# Altium PCB WiFi.PcbDoc
Units mm, origin at the board's own origin, x right, y up, seen from the top; angles counter-clockwise.
Board outline 30 x 26.8 mm, 4 copper layers (TopLayer, int1_power, int2_gnd, BottomLayer), stack 1.25 mm thick; 28 components, 27 nets, 200 pads, 86 vias.
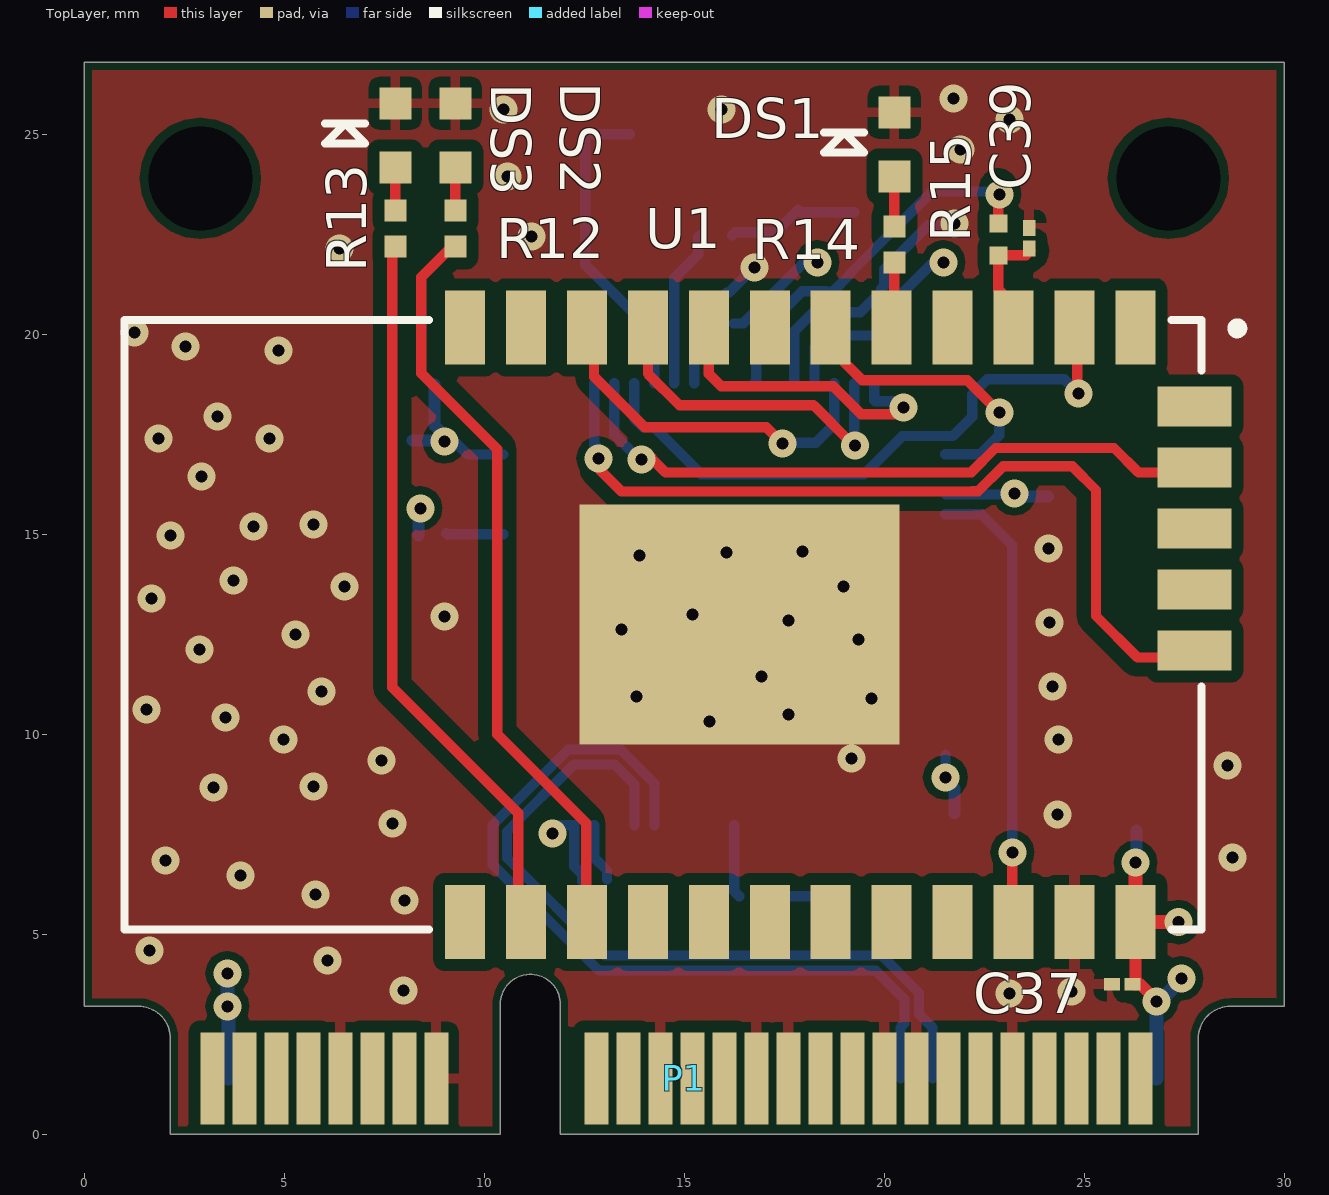
[diagram p0: TopLayer view]
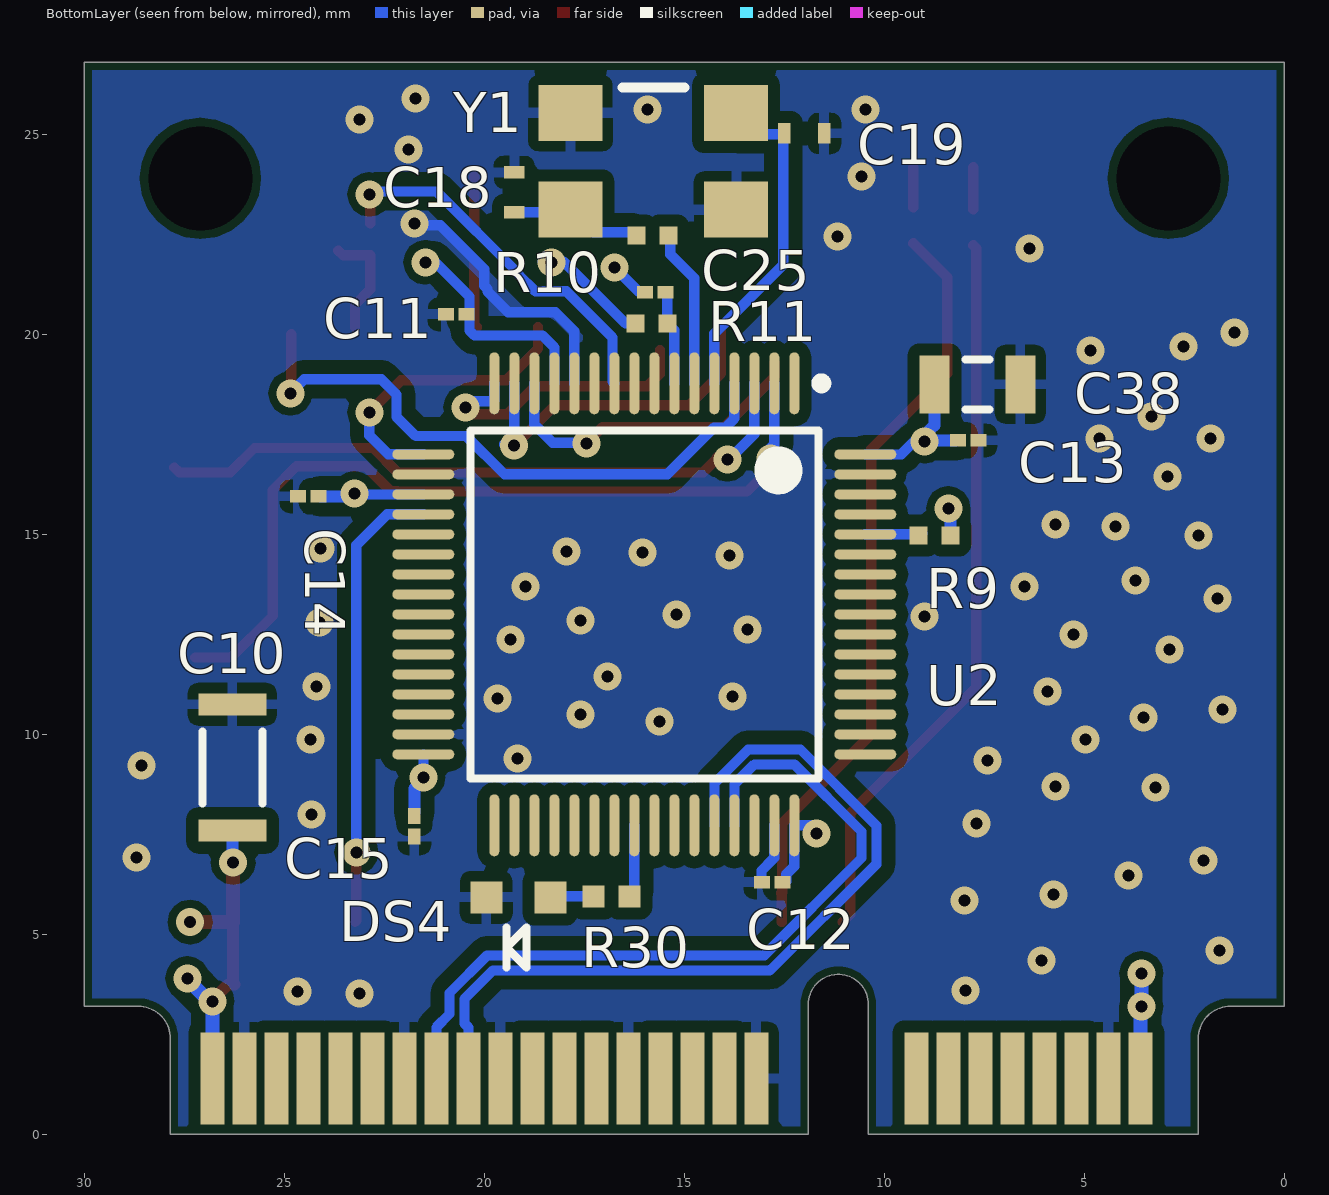
[diagram p1: BottomLayer view, seen from below]
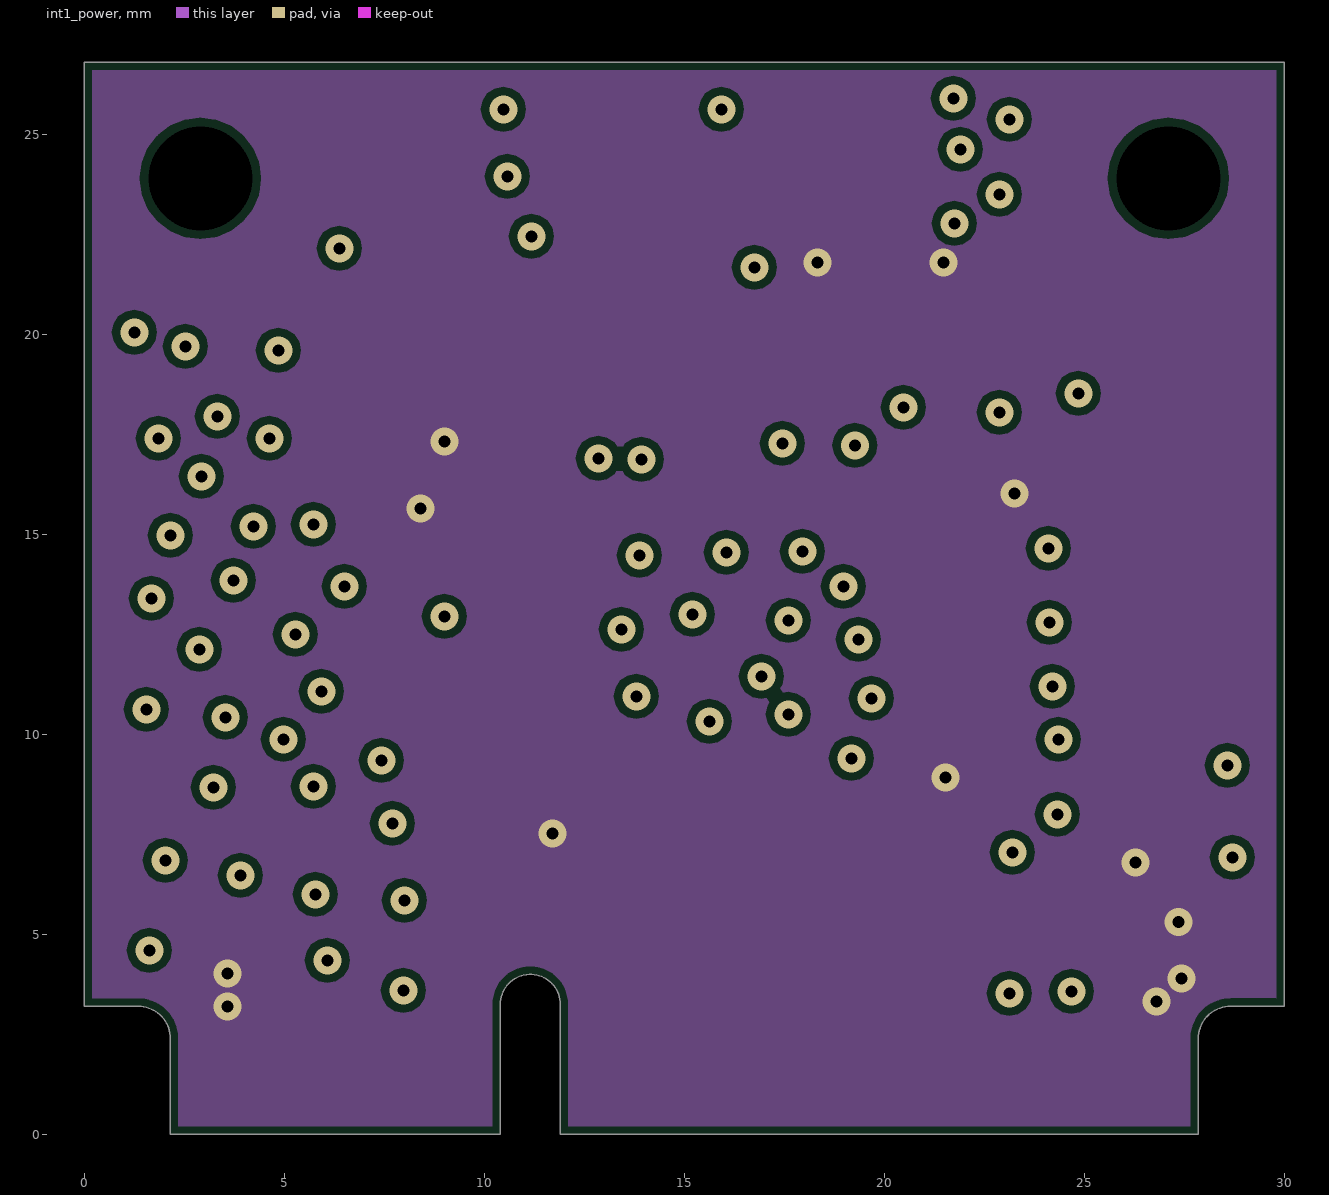
[diagram p2: int1_power]
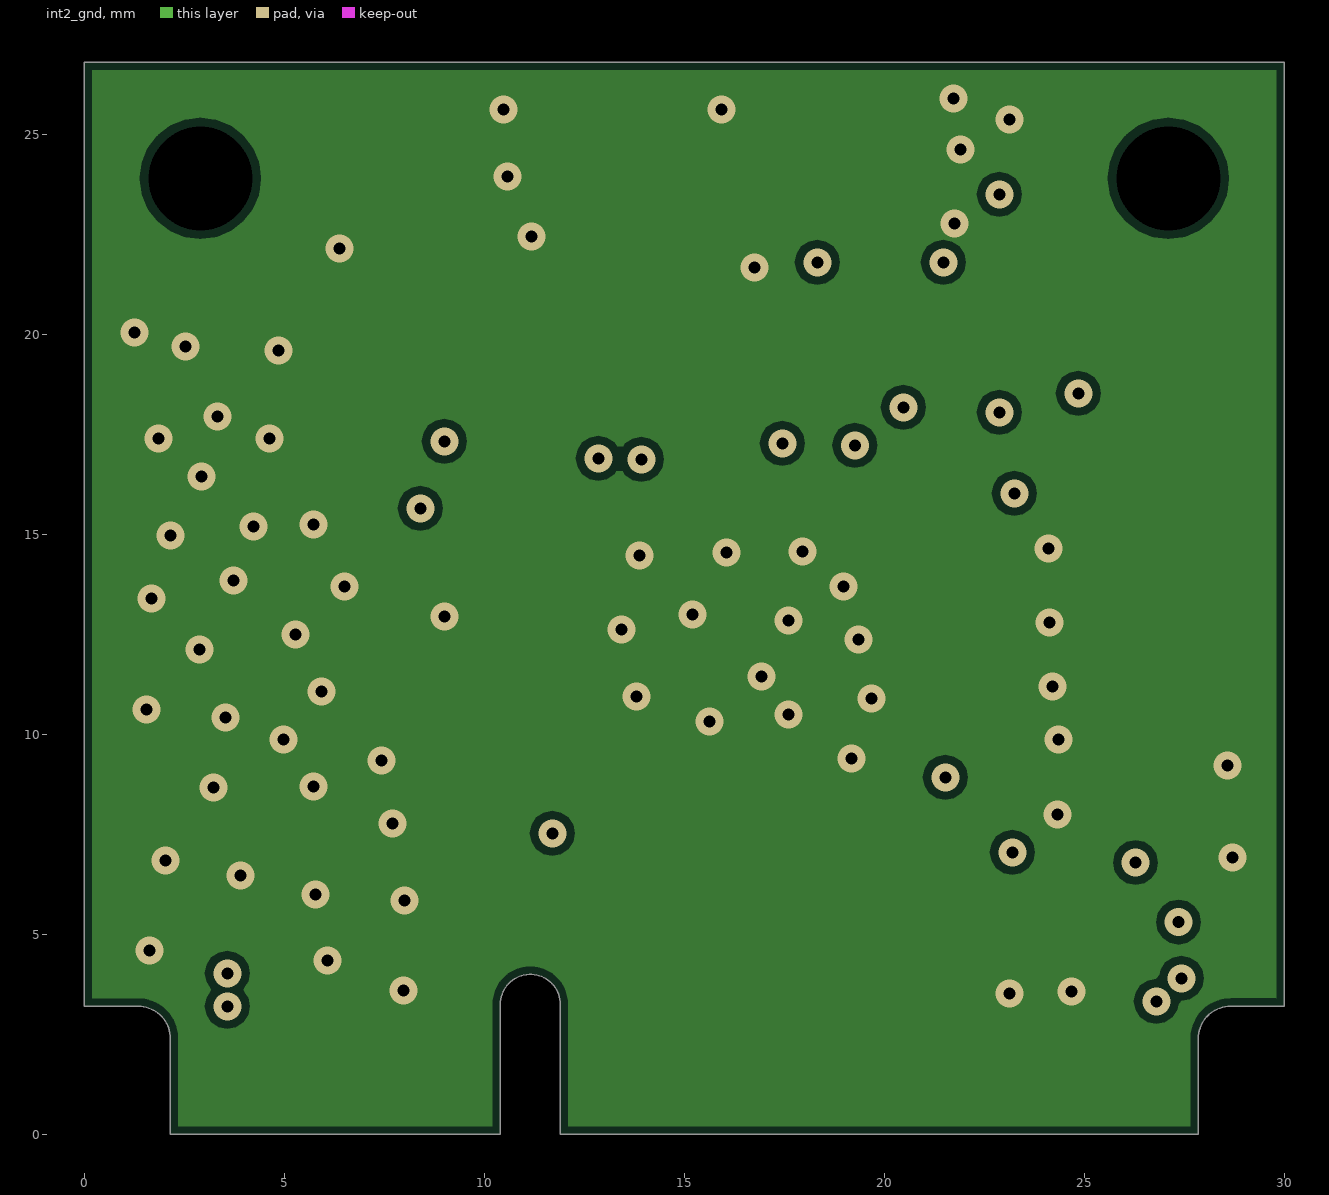
[diagram p3: int2_gnd]
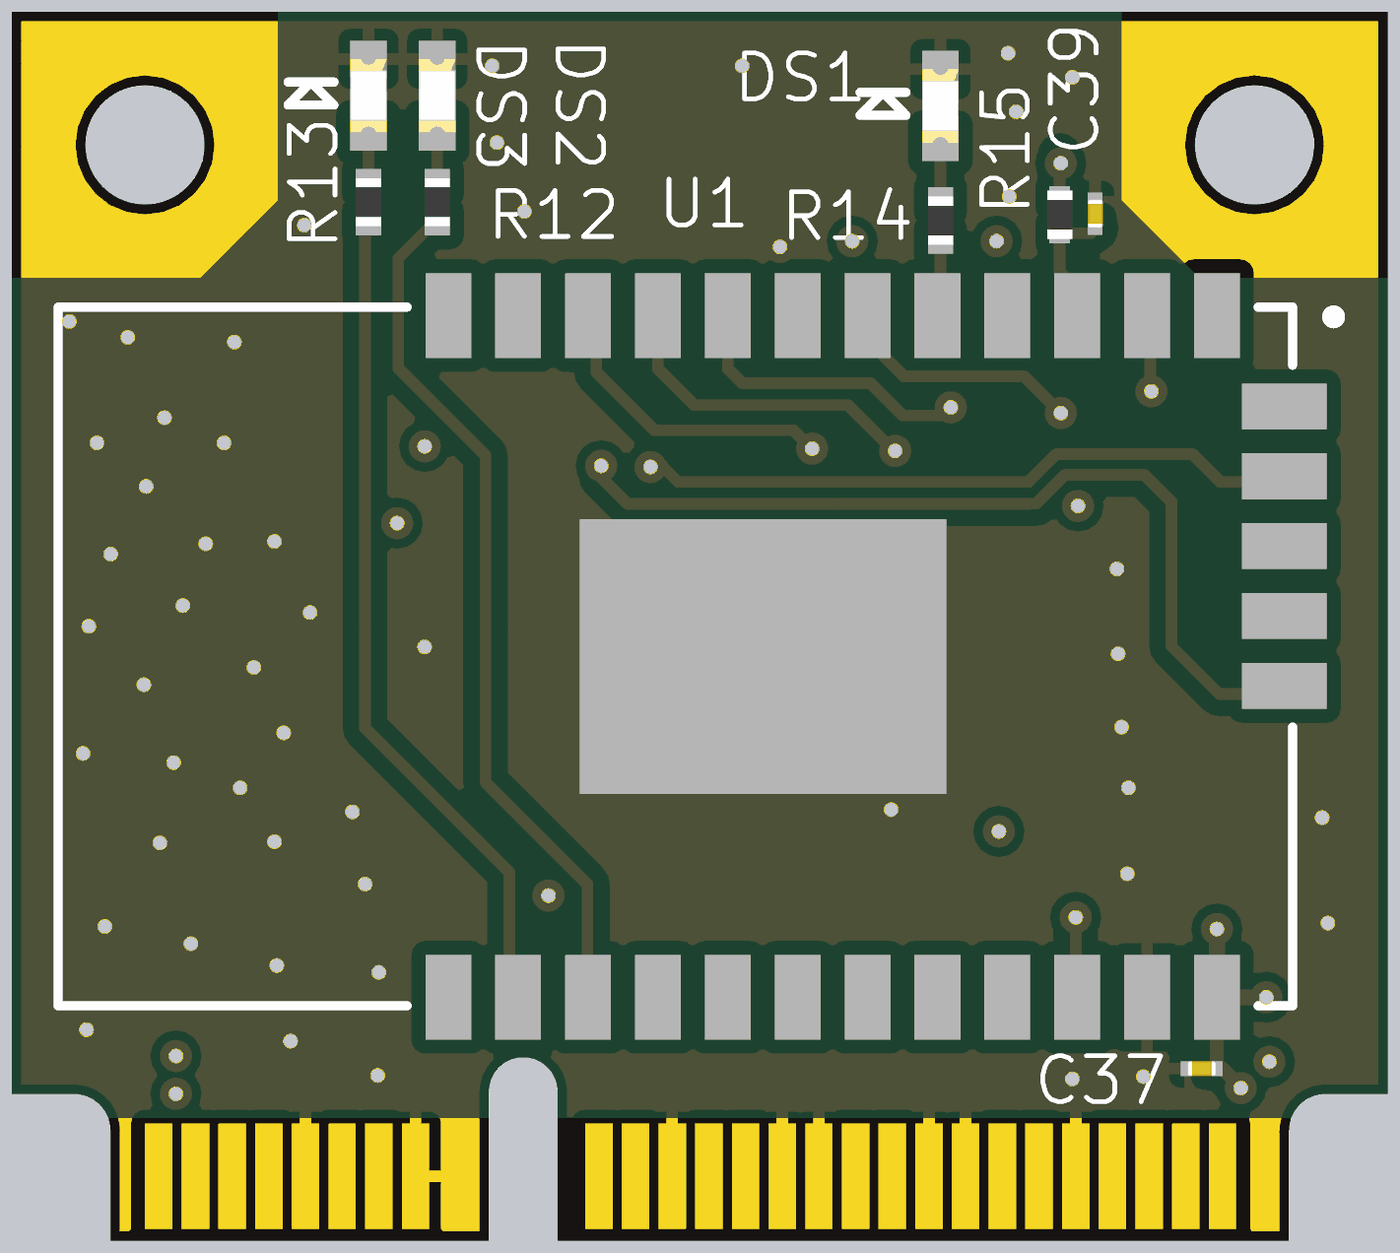
[diagram p4: 3D render of the assembled board from above, using the file's embedded part models]
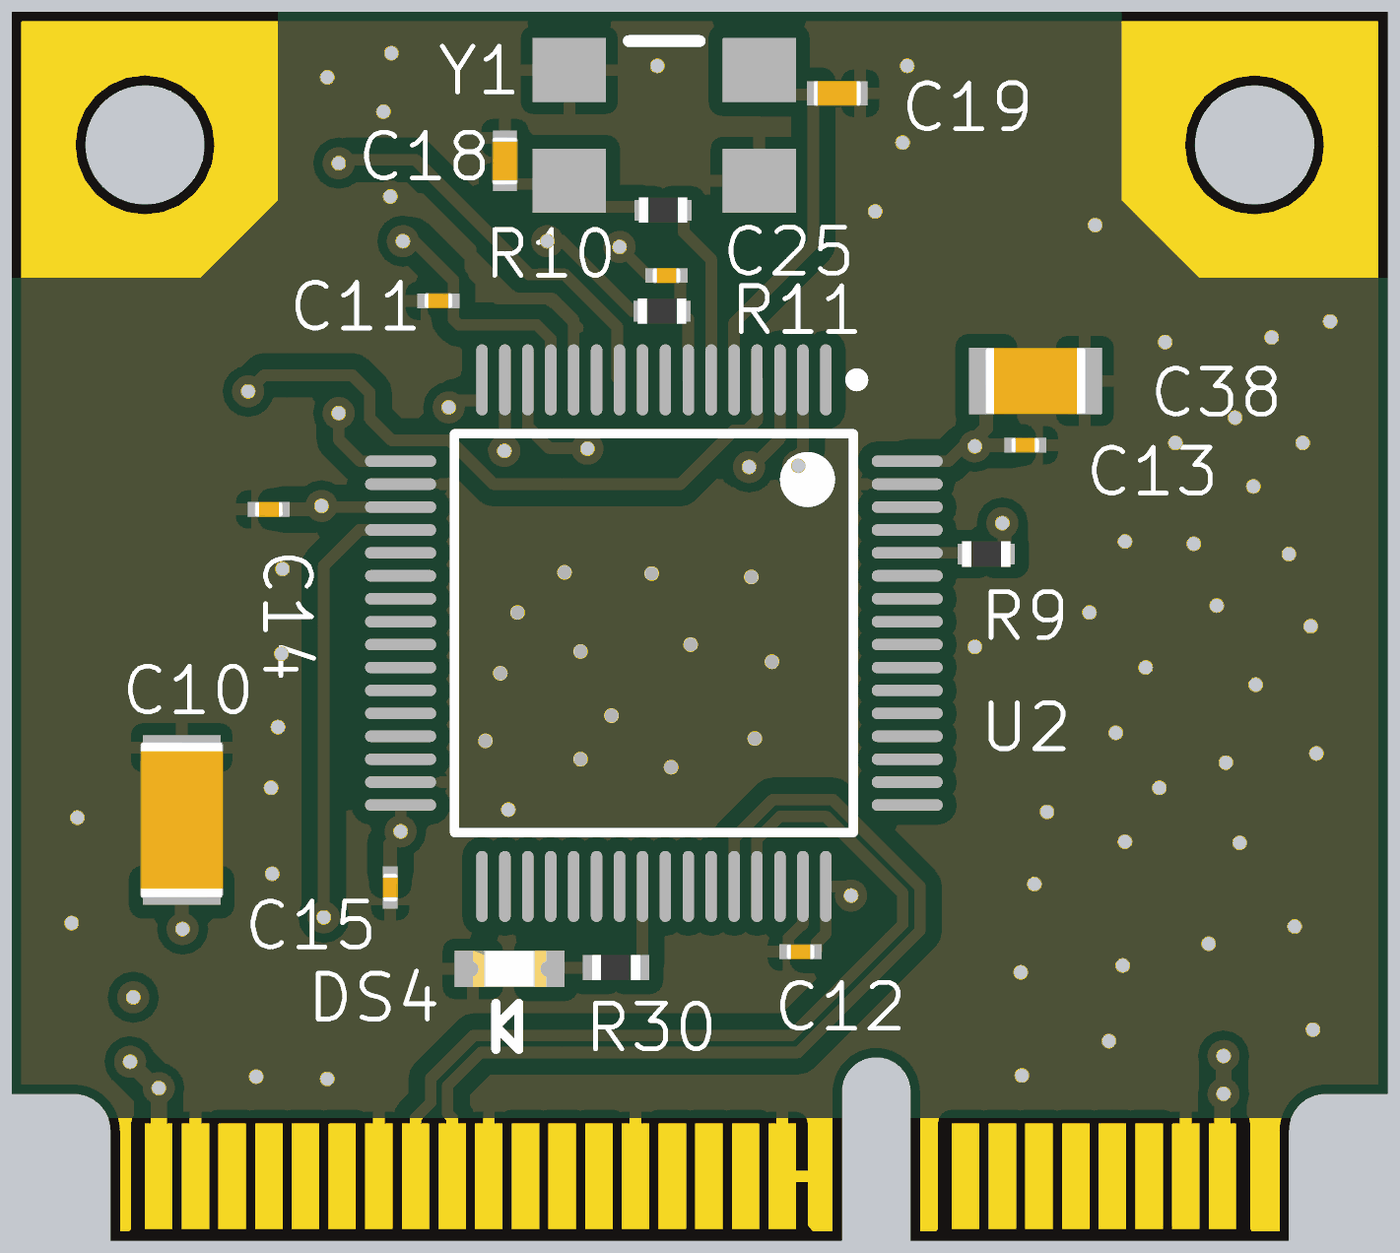
[diagram p5: 3D render of the assembled board from below, using the file's embedded part models]

## Layer stack, top to bottom
TopSolder: solder mask 0.025, Solder Resist, Dk 4.6
TopLayer: signal copper 0.05
Dielectric1: core 0.36, FR-4, Dk 4.6
int1_power: signal copper 0.035
Dielectric2: prepreg 0.36, FR-4, Dk 4.6
int2_gnd: signal copper 0.035
Dielectric3: core 0.36, FR-4, Dk 4.6
BottomLayer: signal copper 0.05
BottomSolder: solder mask 0.025, Solder Resist, Dk 4.6

## Board outline
2.15,2.4 ccw(c1.35,2.4) 1.35,3.2 0,3.2 0,26.8 30,26.8 30,3.2 28.65,3.2 ccw(c28.65,2.4) 27.85,2.4 27.85,0 11.9,0 11.9,3.25 ccw(c11.15,3.25) 10.4,3.25 10.4,0 2.15,0

## Design rules (kind name [scope] priority, off if disabled: settings)
BoardOutlineClearance [All] p1: gap=0.2 ignorepadtopadclearanceinfootprint=FALSE
Clearance Clearance_Diff_pair [InAnyDifferentialPair vs InAnyDifferentialPair] p1: gap=0.1 ignorepadtopadclearanceinfootprint=TRUE
Clearance [All] p2: gap=0.2 ignorepadtopadclearanceinfootprint=TRUE except(0: Arc-Hole Track-Hole SMDPad-Hole THPad-Hole Via-Hole Fill-Hole Poly-Hole Region-Hole Text-Hole; 0.3: SMDPad-Fill SMDPad-Poly SMDPad-Region; 0.35: Arc-Fill Arc-Poly Arc-Region Track-Fill Track-Poly Track-Region)
DiffPairsRouting [InDifferentialPair('PA12_USB_D')] p1: maxlimit=0.12 minlimit=0.12 mostfreqgap=0.12 toplayer_minwidth=0.25 toplayer_maxwidth=0.25 toplayer_prefwidth=0.25 midlayer1_minwidth=0.25 midlayer1_maxwidth=0.25 midlayer1_prefwidth=0.25 midlayer2_minwidth=0.25 midlayer2_maxwidth=0.25 midlayer2_prefwidth=0.25 bottomlayer_minwidth=0.25 bottomlayer_maxwidth=0.25 bottomlayer_prefwidth=0.25 maxuncoupledlength=1
FabricationTestPointUsage TestPointUsage [All] p1: valid=0 allowmultiple=FALSE
FabricationTestpoint Testpoint [All] p1: side=3 testpointundercomponent=TRUE minsize=1.016 maxsize=2.54 preferedsize=1.524 minholesize=0.508 maxholesize=1.016 preferedholesize=0.813 testpointgrid=0.025 allowsidetop=TRUE allowsidebottom=TRUE usegrid=TRUE gridtolerance=0
Height "PCI Express Mini, \"Component height constraints\", Page 18, bottom side" [OnBottomLayer] p1: minheight=0 maxheight=1.35 prefheight=1.35
Height "PCI Express Mini, \"Component height constraints\", Page 18, top side" [OnTopLayer] p2: minheight=0 maxheight=2.4 prefheight=2.4
PlaneClearance [All] p1: clearance=0
PolygonConnect PolygonConnect_Pad [InPadClass('Polygon')] p1: connectstyle=Direct reliefconductorwidth=0.254 reliefentries=4 polygonreliefangle="90 Angle" airgapwidth=0.254
PolygonConnect PolygonConnect_All [All] p2: thpad.connectstyle=Relief thpad.reliefconductorwidth=0.254 thpad.reliefentries=4 thpad.polygonreliefangle="90 Angle" thpad.airgapwidth=0.254 smdpad.connectstyle=Relief smdpad.reliefconductorwidth=0.254 smdpad.reliefentries=4 smdpad.polygonreliefangle="90 Angle" smdpad.airgapwidth=0.254 via.connectstyle=Direct via.reliefconductorwidth=0.254 via.reliefentries=4 via.polygonreliefangle="90 Angle" via.airgapwidth=0.254
RoutingVias [All] p1: holewidth=0.3 width=0.7 viastyle="Through Hole" minholewidth=0.3 minwidth=0.7 maxholewidth=0.3 maxwidth=0.7
SilkToSolderMaskClearance SilkscreenOverComponentPads [IsPad] p1: minsilkscreentomaskgap=0.254 clearancetoexposedcopper=TRUE
SolderMaskExpansion [HasPad('J2-M2')] p1: expansion=0
Width [All] p1: maxlimit=0.35 minlimit=0.25 preferedwidth=0.3
24 further rules are at their usual default settings.

## Classes and differential pairs
pad class Polygon: U1-25
differential pair PA12_USB_D: +PA12_USB_D_P -PA12_USB_D_N

## Components (designator, comment, footprint, x,y, rotation, side; value= is the part's Value field where it differs from the comment)
C10 "C3216X5R1A476M160AB" CAPC3216X180X20LL20 26.3,9.175 r270 bottom
C11 "GRM033R60J104KE19D" CAPC0603X33X15LL03T05 20.7,20.5 r180 bottom
C12 "GRM033R60J104KE19D" CAPC0603X33X15LL03T05 12.8,6.3 r180 bottom
C13 "GRM033R60J104KE19D" CAPC0603X33X15LL03T05 7.9,17.35 r0 bottom
C14 "GRM033R60J104KE19D" CAPC0603X33X15LL03T05 24.4,15.95 r180 bottom
C15 "GRM033R60J104KE19D" CAPC0603X33X15LL03T05 21.75,7.7 r90 bottom
C18 "C1005C0G1H220J050BA" CAPC1005X55X10LL05 19.25,23.55 r270 bottom
C19 "C1005C0G1H220J050BA" CAPC1005X55X10LL05 12,25.025 r180 bottom
C25 "GRM033R60J104KE19D" CAPC0603X33X15LL03T05 15.725,21.05 r180 bottom
C37 "GRM033R60J104KE19D" CAPC0603X33X15LL03T05 25.95,3.75 r0 top
C38 "C2012X5R1C106K085AC" CAPC2013X100X20NL20 7.675,18.75 r0 bottom
C39 "GRM033R60J104KE19D" CAPC0603X33X15LL03T05 23.625,22.4 r90 top
DS1 "150060VS75000" WE-150060VS75000_V 20.25,24.75 r270 top
DS2 "150060VS75000" WE-150060VS75000_V 9.275,24.975 r270 top
DS3 "150060VS75000" WE-150060VS75000_V 7.775,24.975 r270 top
DS4 "150060VS75000" WE-150060VS75000_V 19.15,5.925 r180 bottom
P1 "PCIeMini-CN-2S-M-R52" PCIeMini-GF-2D-800-1K-S52 15,1.4 r0 top locked
R9 "ERJ-2RKF1002X" RESC1005X40X25LL05T05 8.75,14.975 r0 bottom
R10 "ERJ-2GEJ241x" RESC1005X40X25LL05T05 15.8,22.475 r0 bottom
R11 "ERJ-2RKF1002X" RESC1005X40X25LL05T05 15.825,20.275 r180 bottom
R12 "ERJ-2RKF1001X" RESC1005X40X25NL05T05 9.275,22.65 r270 top
R13 "ERJ-2RKF1001X" RESC1005X40X25NL05T05 7.775,22.65 r270 top
R14 "ERJ-2RKF1001X" RESC1005X40X25NL05T05 20.25,22.25 r270 top
R15 "ERJ-2RKF4701X" RESC1005X40X25LL05T05 22.85,22.375 r90 top
R30 "ERJ-2RKF1001X" RESC1005X40X25NL05T05 16.825,5.95 r180 bottom
U1 "SPWF01SA" STM-SPWF01SA_V 16.38,12.741 r180 top
U2 "STM32F103RBT7TR" STM-LQFP64_L 16,13.25 r270 bottom
Y1 "FQ5032B-24" FOX-FQ5032B_V 15.775,24.325 r180 bottom

## Footprints (in the part's own frame and the unit in brackets; to place one, negate y for a bottom-side part, rotate by r counter-clockwise, add the part's x,y. Pads: shape width x height; smd on the part's side, far side on the other; paste and mask are expansions set on the pad)
CAPC0603X33X15LL03T05 [mm] "Chip Capacitor, 2-Leads, Body 0.63x0.33mm, IPC High Density"
  rect 0.4x0.32 smd: 1(-0.26,0) 2(0.26,0)
  body extent -0.31,-0.16 0.32,0.17, height 0.33
CAPC1005X55X10LL05 [mm] "Chip Capacitor, 2-Leads, Body 1.05x0.55mm, IPC High Density"
  rect 0.32x0.52 smd: 1(-0.5,0) 2(0.5,0)
  body extent -0.52,-0.28 0.53,0.27, height 0.55
CAPC2013X100X20NL20 [mm] "Chip Capacitor, 2-Leads, Body 2.2x1.45mm, IPC Medium Density"
  rect 0.75x1.45 smd: 1(-1.075,0) 2(1.075,0)
  silkscreen extent -0.3,-0.63 0.3,0.63, body extent -1.1,-0.72 1.1,0.72, height 1
CAPC3216X180X20LL20 [mm] "Chip Capacitor, 2-Leads, Body 3.40x1.80mm, IPC High Density"
  rect 0.55x1.7 smd: 1(-1.575,0) 2(1.575,0)
  silkscreen extent -0.9,-0.75 0.9,0.75, body extent -1.7,-0.9 1.7,0.9, height 1.8
FOX-FQ5032B_V [mil] "SMT Crystal, 4-Leads, Body 5.2x3.4mm"
  rect 63x55 smd: 1(-81.5,-47.5) 2(81.5,-47.5) 3(81.5,47.5) 4(-81.5,47.5)
  silkscreen extent -30,72 31,72, body extent -114,-52 113,51, height 47
PCIeMini-GF-2D-800-1K-S52 [mm] "Golden finger, PCIeMini, Dual, Staggered, Pitch 0.8mm, 52-Position"
  rect 0.6x2.3 smd paste-0.9: 1(-11.8,0) 3(-11,0) 5(-10.2,0) 7(-9.4,0) 9(-8.6,0) 11(-7.8,0) 13(-7,0) 15(-6.2,0) 17(-2.2,0) 19(-1.4,0) 21(-0.6,0) 23(0.2,0) 25(1,0) 27(1.8,0) 29(2.6,0) 31(3.4,0) 33(4.2,0) 35(5,0) 37(5.8,0) 39(6.6,0) 41(7.4,0) 43(8.2,0) 45(9,0) 47(9.8,0) 49(10.6,0) 51(11.4,0)
  rect 0.6x2.3 smd far side paste-0.9: 2(-11.4,0) 4(-10.6,0) 6(-9.8,0) 8(-9,0) 10(-8.2,0) 12(-7.4,0) 14(-6.6,0) 16(-5.8,0) 18(-1.8,0) 20(-1,0) 22(-0.2,0) 24(0.6,0) 26(1.4,0) 28(2.2,0) 30(3,0) 32(3.8,0) 34(4.6,0) 36(5.4,0) 38(6.2,0) 40(7,0) 42(7.8,0) 44(8.6,0) 46(9.4,0) 48(10.2,0) 50(11,0) 52(11.8,0)
RESC1005X40X25LL05T05 [mm] "Chip Resistor, 2-Leads, Body 1.05x0.55mm, IPC High Density"
  rect 0.45x0.45 smd: 1(-0.4,0) 2(0.4,0)
  body extent -0.52,-0.28 0.53,0.27, height 0.4
RESC1005X40X25NL05T05 [mm] "Chip Resistor, 2-Leads, Body 1.05x0.55mm, IPC Medium Density"
  rect 0.55x0.55 smd: 1(-0.45,0) 2(0.45,0)
  body extent -0.53,-0.28 0.53,0.28, height 0.4
STM-LQFP64_L [mm] "Thin QFP, 64-Leads, Body 10x10mm, Pitch 0.5mm, IPC High Density"
  oval 1.55x0.25 smd: 1(-5.525,3.75) 2(-5.525,3.25) 3(-5.525,2.75) 4(-5.525,2.25) 5(-5.525,1.75) 6(-5.525,1.25) 7(-5.525,0.75) 8(-5.525,0.25) 9(-5.525,-0.25) 10(-5.525,-0.75) 11(-5.525,-1.25) 12(-5.525,-1.75) 13(-5.525,-2.25) 14(-5.525,-2.75) 15(-5.525,-3.25) 16(-5.525,-3.75) 33(5.525,-3.75) 34(5.525,-3.25) 35(5.525,-2.75) 36(5.525,-2.25) 37(5.525,-1.75) 38(5.525,-1.25) 39(5.525,-0.75) 40(5.525,-0.25) 41(5.525,0.25) 42(5.525,0.75) 43(5.525,1.25) 44(5.525,1.75) 45(5.525,2.25) 46(5.525,2.75) 47(5.525,3.25) 48(5.525,3.75)
  oval 0.25x1.55 smd: 17(-3.75,-5.525) 18(-3.25,-5.525) 19(-2.75,-5.525) 20(-2.25,-5.525) 21(-1.75,-5.525) 22(-1.25,-5.525) 23(-0.75,-5.525) 24(-0.25,-5.525) 25(0.25,-5.525) 26(0.75,-5.525) 27(1.25,-5.525) 28(1.75,-5.525) 29(2.25,-5.525) 30(2.75,-5.525) 31(3.25,-5.525) 32(3.75,-5.525) 49(3.75,5.525) 50(3.25,5.525) 51(2.75,5.525) 52(2.25,5.525) 53(1.75,5.525) 54(1.25,5.525) 55(0.75,5.525) 56(0.25,5.525) 57(-0.25,5.525) 58(-0.75,5.525) 59(-1.25,5.525) 60(-1.75,5.525) 61(-2.25,5.525) 62(-2.75,5.525) 63(-3.25,5.525) 64(-3.75,5.525)
  silkscreen extent -5.65,-4.35 4.35,4.55, body extent -5,-5 5,5, height 1.6
STM-SPWF01SA_V [mm] "SMD, 30-Leads, Body 26.924x15.24mm, Pitch 1.524mm, Height 2.45mm"
  rect 1x1.85 smd: 1(-9.9,-7.435) 2(-8.376,-7.435) 3(-6.852,-7.435) 4(-5.328,-7.435) 5(-3.804,-7.435) 6(-2.28,-7.435) 7(-0.756,-7.435) 8(0.768,-7.435) 9(2.292,-7.435) 10(3.816,-7.435) 11(5.34,-7.435) 12(6.864,-7.435) 13(6.864,7.435) 14(5.34,7.435) 15(3.816,7.435) 16(2.292,7.435) 17(0.768,7.435) 18(-0.756,7.435) 19(-2.28,7.435) 20(-3.804,7.435) 21(-5.328,7.435) 22(-6.852,7.435) 23(-8.376,7.435) 24(-9.9,7.435)
  rect 8x6 smd: 25(0,0)
  rect 1.85x1 smd: 26(-11.37,0.641) 27(-11.37,-0.883) 28(-11.37,-2.407) 29(-11.37,-3.931) 30(-11.37,-5.455)
  silkscreen extent -12.57,-7.62 15.37,7.62, body extent -11.55,-7.62 15.37,7.62, height 2.45
WE-150060VS75000_V [mm] "SMD, 2-Leads, Body 1.6x0.8mm"
  rect 0.8x0.8 smd: 1(-0.8,0) 2(0.8,0)
  silkscreen extent -0.3,-1.75 0.2,-0.75, body extent -0.8,-0.4 0.8,0.4, height 0.7

## Part data
C10: library part CMP-1663-00005-1, "Chip Capacitor, 47 uF, +/- 20%, 10 V, -55 to 85 degC, 1206 (3216 Metric), RoHS, Tape and Reel"
C11 C12 C13 C14 C15 C25 C37 C39: library part CMP-2010-01652-4, "Chip Capacitor, 100 nF, +/- 10%, 6.3 V, -55 to 85 degC, 0201 (0603 Metric), RoHS, Tape and Reel"
C18 C19: library part CMP-1663-00008-2, "Chip Capacitor, 22 pF, +/- 5%, 50 V, -55 to 125 degC, 0402 (1005 Metric), RoHS, Tape and Reel"
C38: library part CMP-1663-00007-1, "Chip Capacitor, 10 uF, +/- 10%, 16 V, -55 to 85 degC, 0805 (2012 Metric), RoHS, Tape and Reel"
DS1 DS2 DS3 DS4: library part CMP-1712-00001-3, "WL-SMCW SMD Chip LED Top View Monocolor Waterclear, 30 mA, 2 V, -40 to 85 degC, 2-Pin SMD, RoHS, Tape and Reel"
P1: library part CMP-0001-00067-2, "Golden finger, PCIeMini, Dual, Staggered, Pitch 0.8mm, 52-Position"
R9 R11: library part CMP-2002-00607-3, "Chip Resistor, 10 KOhm, +/- 1%, 100 mW, -55 to 155 degC, 0402 (1005 Metric), RoHS, Tape and Reel"
R10: library part CMP-2002-00493-3, "Chip Resistor, 240 Ohm, +/- 5%, 100 mW, -55 to 155 degC, 0402 (1005 Metric), RoHS, Tape and Reel"
R12 R13 R14 R30: library part CMP-2002-00606-3, "Chip Resistor, 1 KOhm, +/- 1%, 100 mW, -55 to 155 degC, 0402 (1005 Metric), RoHS, Tape and Reel"
R15: library part CMP-1665-00031-3, "Chip Resistor, 4.7 KOhm, +/- 1%, 0.1 W, -55 to 155 degC, 0402 (1005 Metric), RoHS, Tape and Reel"
U1: library part CMP-1771-00005-1, "Serial to WiFi Server IEEE802.11b/g/n Intelligent Module, 3.3 V, - 40 to 85 degC, 30-Pin SMD, RoHS, Tray"
U2: library part CMP-0237-00158-3, "ARM Cortex-M3 32-bit MCU, 128 KB Flash, 20 KB Internal RAM, 51 I/Os, 64-pin LQFP, -40 to 105 degC, Tape and Reel"
Y1: library part CMP-0399-00003-1, "Crystal Oscillator, SMD, 24MHz, Stab=30ppm 20.0pF"

## Free pads (board coordinates)
  round 2.3 hole 2.6 unplated: MH1(2.9,23.9) MH2(27.1,23.9)

## Via types
v1: diameter 0.7, hole 0.3, TopLayer to BottomLayer, tented both sides, 86 vias

## Nets (pads, with @x,y where several pads share a name; then routed paths per layer and width w, separated by ;. In a path a pad name is that pad's centre, name@x,y a point inside that pad or via, vN(x,y) a via of type N, cw(c..) or ccw(c..) an arc to the next point about the centre after c; other vN are vias at no path point)
3V3: C10.2 C11.2 C12.2 C13.2 C14.2 C15.2 C37.2 C38.2 P1.2 P1.52 R9.1 R11.1 U1.24 U2.13 U2.19 U2.32 U2.48 U2.64 | length 30.7
  TopLayer w0.25: v1@26.28,6.78 v1(26.28,6.795)
  TopLayer w0.3: C37.2@26.25,3.75 26.4,3.75 v1@26.7,3.45 ; U1.24 26.28,3.87 C37.2@26.3,3.85
  TopLayer w0.35: v1@26.28,6.78 U1.24 v1(27.356,5.306)
  BottomLayer w0.25: v1(9,17.325) 9.25,17.325 9.575,17 U2.64 ; R11.1 16.475,20.275 18.025,21.825 18.55,21.825 18.325,21.6 v1(18.325,21.8) ; U2.13 18.25,19.675 18.55,19.975 20.25,19.975 20.375,20.1 20.375,20.95 21.275,21.85 21.475,21.85 v1(21.475,21.8) ; v1(21.525,8.925) U2.32 ; U2.19 v1@23.075,16
  BottomLayer w0.254: v1(11.7,7.525) 11.55,7.525 11.75,7.725 U2.48 12.25,6.7 12.45,6.5 C12.2@12.45,6.325
  BottomLayer w0.3: C13.2@8.21,17.35 8.975,17.35 v1(9,17.325) ; R9.1 8.35,15.6 v1(8.4,15.65) ; C38.2 8.75,17.725 v1@9.025,17.45 ; v1@21.475,8.925 21.75,8.65 C15.2@21.75,8.035 ; v1@23.3,16.025 23.375,15.95 C14.2@24.09,15.95 ; v1@26.275,6.925 26.3,6.95 C10.2
  BottomLayer w0.35: v1(3.575,4.025) v1(3.575,3.2) 3.6,3.175 P1.2 ; P1.52 v1(26.8,3.325) 26.875,3.325 27.425,3.875 v1(27.425,3.9)
  other v1: 23.25,16.025
GND: C10.1 C11.1 C12.1 C13.1 C14.1 C15.1 C18.1 C19.2 C25.1 C37.1 C38.1 C39.2 DS1.1 DS2.1 DS3.1 DS4.1 P1.4 P1.9 P1.15 P1.18 P1.21 P1.26 P1.27 P1.29 P1.34 P1.35 P1.37 P1.40 P1.43 P1.50 U1.23 U1.25 U2.12 U2.18 U2.31 U2.47 U2.63 Y1.2 Y1.4 | length 9
  BottomLayer w0.25: C25.1@16.06,21.05 16.125,21.05 v1(16.75,21.675)
  BottomLayer w0.254: U2.47 12.75,6.908 12.783,6.875 12.787,6.875 13.067,6.595 C12.1@13.067,6.375 ; U2.12 17.75,20.075 18.225,20.55 19.4,20.55 19.923,21.073 19.923,21.137 20,21.214 20,21.625 21.1,22.725 v1@21.625,22.725
  other v1: 23.125,3.525 24.675,3.575 7.975,3.6 6.075,4.35 1.625,4.6 8,5.85 5.775,6 3.9,6.475 2.025,6.85 28.7,6.925 7.7,7.775 24.325,8 3.225,8.675 5.725,8.7 28.575,9.225 7.425,9.35 19.175,9.4 4.975,9.875 24.35,9.875 15.625,10.325 3.525,10.425 17.6,10.5 1.55,10.625 19.675,10.9 13.8,10.95 5.925,11.075 24.2,11.2 16.925,11.45 2.875,12.125 19.35,12.375 5.275,12.5 13.425,12.625 24.125,12.8 17.6,12.85 9,12.95 15.2,13 1.675,13.4 6.5,13.7 18.975,13.7 3.725,13.85 13.875,14.475 16.05,14.55 17.95,14.575 24.1,14.65 2.15,14.975 4.225,15.2 5.725,15.25 2.925,16.45 1.85,17.4 4.625,17.4 3.325,17.95 4.85,19.6 2.525,19.7 1.25,20.05 6.375,22.15 11.175,22.45 21.75,22.775 10.575,23.95 21.9,24.625 23.125,25.375 10.475,25.625 15.925,25.625 21.725,25.9
NetC18_2: C18.2 R10.2 Y1.1 | length 3.3
  BottomLayer w0.254: R10.2 16.275,22.55 17.277,22.55 Y1.1 17.914,23.05 C18.2
NetC19_1: C19.1 U2.5 Y1.3 | length 8.1
  BottomLayer w0.254: C19.1 C19.1@12.525,25 ; Y1.3@13.636,25 C19.1@12.525,25 ; U2.5 14.25,20.012 12.525,21.737 C19.1@12.525,25
NetC25_2: C25.2 R11.2 U2.7 | length 2.2
  BottomLayer w0.254: U2.7 15.25,20.1 R11.2 C25.2@15.425,20.942
NetC39_1: C39.1 R15.1 U1.3 | length 2.8
  TopLayer w0.254: U1.3 23.232,20.743 22.85,21.125 R15.1 23.535,21.975 C39.1@23.65,22.09
NetDS1_2: DS1.2 R14.1 | length 1.3
  TopLayer w0.254: R14.1 DS1.2
NetDS2_2: DS2.2 R12.1 | length 1
  TopLayer w0.254: R12.1@9.275,23.175 DS2.2
NetDS3_2: DS3.2 R13.1 | length 1
  TopLayer w0.254: R13.1@7.775,23.125 DS3.2
NetDS4_2: DS4.2 R30.1 | length 1.2
  BottomLayer w0.254: R30.1 18.4,5.95 DS4.2@18.45,6
NetR9_2: R9.2 U2.60 | length 1.4
  BottomLayer w0.254: R9.2@9.05,15.025 9.075,15 U2.60
NetR10_1: R10.1 U2.6 | length 4
  BottomLayer w0.254: U2.6 14.75,21.4 15.35,22 15.35,22.425 R10.1
NetR12_2: R12.2 U1.15 | length 19.1
  TopLayer w0.254: R12.2@9.275,22.275 8.425,21.425 8.425,19.025 10.325,17.125 10.325,10 12.55,7.775 12.55,6.05 U1.15@12.564,6.036 ; U1.15 U1.15@12.564,6.036 ; U1.15@12.575,6.025 U1.15@12.564,6.036
NetR13_2: R13.2 U1.14 | length 18.3
  TopLayer w0.254: R13.2@7.775,22.225 7.7,22.15 7.7,11.175 10.55,8.325 10.85,8.025 10.85,5.496 U1.14
NetR14_2: R14.2 U1.5 | length 1.7
  TopLayer w0.254: U1.5 20.25,20.242 R14.2
NetR30_2: R30.2 U2.40 | length 1.8
  BottomLayer w0.254: U2.40 16.25,6.075 R30.2
PA0_USART2_CTS: U1.10 U2.14 | length 8.3
  TopLayer w0.254: U1.10@12.745,19.303 12.745,18.94 14.008,17.677 17.048,17.677 v1(17.45,17.275)
  BottomLayer w0.254: v1(17.45,17.275) 17.463,17.288 18.288,17.288 18.75,17.75 U2.14
PA1_USART2_RTS: U1.9 U2.15 | length 8.7
  TopLayer w0.254: U1.9 14.088,19.018 14.881,18.225 18.232,18.225 v1@19.161,17.296
  BottomLayer w0.254: U2.15 19.25,17.238 v1(19.263,17.225) 19.475,17.225 v1@19.5,17.25
PA2_USART2_TX: U1.8 U2.16 | length 7.1
  TopLayer w0.254: U1.8@15.612,19.6 15.612,19.013 15.925,18.7 18.725,18.7 19.425,18 v1@20.475,18
  BottomLayer w0.254: U2.16 19.75,18.35 19.775,18.325 20.325,18.325 v1(20.475,18.175)
PA3_USART2_RX: U1.6 U2.17 | length 7.5
  TopLayer w0.254: U1.6 18.66,19.642 19.45,18.852 21.195,18.852 21.197,18.85 22.075,18.85 v1(22.875,18.05)
  BottomLayer w0.254: U2.17 22.4,17 22.875,17.475 v1(22.875,18.05)
PA4_GPIO6_WIFI: U1.22 U2.20 | length 11.4
  TopLayer w0.254: v1(23.2,7.05) 23.2,5.338 U1.22
  BottomLayer w0.254: U2.20 22.425,15.5 23.2,14.725 v1(23.2,7.05)
PA12_USB_D_N: P1.36 U2.44 | length 20.9
  BottomLayer w0.25: U2.44 14.25,8.773 13.403,9.62 12.097,9.62 10.2,7.723 10.2,6.752 12.847,4.105 12.87,4.105 12.875,4.1 19.78,4.1 20.5,3.38 20.5,2.775 20.4,2.675 P1.36
PA12_USB_D_P: P1.38 U2.45 | length 19.7
  BottomLayer w0.25: U2.45 13.75,8.75 13.25,9.25 12.25,9.25 10.57,7.57 10.57,6.905 13,4.475 19.928,4.475 20.87,3.533 20.87,3.005 21.2,2.675 P1.38
PC2_WF_RESET: R15.2 U2.10 | length 9.9
  TopLayer w0.254: R15.2 22.85,23.675 22.875,23.65 v1(22.875,23.5)
  BottomLayer w0.25: 18.525,21.075 18.725,21.075 19.145,21.495 19.145,21.52 21.2,23.575 v1@22.725,23.575
  BottomLayer w0.254: U2.10 16.798,18.823 16.798,19.923 17.95,21.075 18.525,21.075 ; v1@22.725,23.5 v1(22.875,23.5)
PC13_SPW_SWDIO: U1.26 U2.2 | length 21
  TopLayer w0.254: v1(12.85,16.9) 12.85,16.65 13.432,16.068 22.182,16.068 22.189,16.075 22.343,16.075 22.97,16.702 24.698,16.702 25.29,16.11 25.29,12.96 26.326,11.924 U1.26@27.234,11.924
  BottomLayer w0.254: U2.2 12.75,17.25 13,17 12.9,16.9 v1(12.85,16.9)
PC14_SPW_SWCLK: U1.29 U2.3 | length 17
  TopLayer w0.254: v1(13.925,16.875) v1@14.125,16.875 ; U1.29 27.626,16.548 26.352,16.548 25.744,17.156 22.782,17.156 22.174,16.548 14.527,16.548 14.325,16.75 v1@14.163,16.912 ; v1@14.125,16.875 14.175,16.925 v1@14.163,16.912 ; v1@14.125,16.875 v1@14.163,16.912
  BottomLayer w0.254: U2.3 13.25,17.5 13.862,16.888 v1@14.112,16.888
PC15_SPW_BOOT0: U1.2 U2.4 | length 15.5
  TopLayer w0.254: U1.2@24.825,20 24.825,18.55 v1(24.85,18.525)
  BottomLayer w0.254: U2.4 13.75,17.892 13.969,17.673 14.252,17.673 15.425,16.5 19.495,16.5 20.449,17.454 21.712,17.454 22.198,17.94 22.198,18.498 22.575,18.875 24.5,18.875 v1(24.85,18.525)
pads on no net: P1.1 P1.3 P1.5 P1.6 P1.7 P1.8 P1.10 P1.11 P1.12 P1.13 P1.14 P1.16 P1.17 P1.19 P1.20 P1.22 P1.23 P1.24 P1.25 P1.28 P1.30 P1.31 P1.32 P1.33 P1.39 P1.41 P1.42 P1.44 P1.45 P1.46 P1.47 P1.48 P1.49 P1.51 U1.1 U1.4 U1.7 U1.11 U1.12 U1.13 U1.16 U1.17 U1.18 U1.19 U1.20 U1.21 U1.27 U1.28 U1.30 U2.1 U2.8 U2.9 U2.11 U2.21 U2.22 U2.23 U2.24 U2.25 U2.26 U2.27 U2.28 U2.29 U2.30 U2.33 U2.34 U2.35 U2.36 U2.37 U2.38 U2.39 U2.41 U2.42 U2.43 U2.46 U2.49 U2.50 U2.51 U2.52 U2.53 U2.54 U2.55 U2.56 U2.57 U2.58 U2.59 U2.61 U2.62

## Polygon pours and split planes (outlines as drawn)
3V3 on int1_power "int1_3V3" (solid, remove dead copper, pour order 1): 2.15,2.4 ccw(c1.35,2.4) 1.35,3.2 0,3.2 0,26.8 30,26.8 30,3.2 28.65,3.2 ccw(c28.65,2.4) 27.85,2.4 27.85,0 11.9,0 11.9,3.25 ccw(c11.15,3.25) 10.4,3.25 10.4,0 2.15,0
GND on TopLayer "Top_GND" (solid, remove dead copper, pour order 3): 2.15,2.4 ccw(c1.35,2.4) 1.35,3.2 0,3.2 0,26.8 30,26.8 30,3.2 28.65,3.2 ccw(c28.65,2.4) 27.85,2.4 27.85,0 11.9,0 11.9,3.25 ccw(c11.15,3.25) 10.4,3.25 10.4,0 2.15,0
GND on BottomLayer "Bottom_GND" (solid, remove dead copper, pour order 4): 2.15,2.4 ccw(c1.35,2.4) 1.35,3.2 0,3.2 0,26.8 30,26.8 30,3.2 28.65,3.2 ccw(c28.65,2.4) 27.85,2.4 27.85,0 11.9,0 11.9,3.25 ccw(c11.15,3.25) 10.4,3.25 10.4,0 2.15,0
GND on int2_gnd "int2_gnd" (solid, remove dead copper, pour order 5): 2.15,2.4 ccw(c1.35,2.4) 1.35,3.2 0,3.2 0,26.8 30,26.8 30,3.2 28.65,3.2 ccw(c28.65,2.4) 27.85,2.4 27.85,0 11.9,0 11.9,3.25 ccw(c11.15,3.25) 10.4,3.25 10.4,0 2.15,0

## Silkscreen, mask and mechanical layers (free items; w line width, h text height)
TopSolder:
  region: 5.8,22.7 4.1,21 0,21 0,26.8 5.8,26.8 hole: 2.9,25.211 2.561,25.167 2.244,25.036 1.973,24.827 1.764,24.556 1.633,24.239 1.589,23.9 1.633,23.561 1.764,23.244 1.973,22.973 2.244,22.764 2.561,22.633 2.9,22.589 3.239,22.633 3.556,22.764 3.827,22.973 4.036,23.244 4.167,23.561 4.211,23.9 4.167,24.239 4.036,24.556 3.827,24.827 3.556,25.036 3.239,25.167
  region: 25.9,21 24.2,22.7 24.2,26.8 30,26.8 30,21 hole: 28.411,23.9 28.367,24.239 28.236,24.556 28.027,24.827 27.756,25.036 27.439,25.167 27.1,25.211 26.761,25.167 26.444,25.036 26.173,24.827 25.964,24.556 25.833,24.239 25.789,23.9 25.833,23.561 25.964,23.244 26.173,22.973 26.444,22.764 26.761,22.633 27.1,22.589 27.439,22.633 27.756,22.764 28.027,22.973 28.236,23.244 28.367,23.561
BottomSolder:
  region: 5.8,22.7 4.1,21 0,21 0,26.8 5.8,26.8 hole: 2.9,25.211 2.561,25.167 2.244,25.036 1.973,24.827 1.764,24.556 1.633,24.239 1.589,23.9 1.633,23.561 1.764,23.244 1.973,22.973 2.244,22.764 2.561,22.633 2.9,22.589 3.239,22.633 3.556,22.764 3.827,22.973 4.036,23.244 4.167,23.561 4.211,23.9 4.167,24.239 4.036,24.556 3.827,24.827 3.556,25.036 3.239,25.167
  region: 25.9,21 24.2,22.7 24.2,26.8 30,26.8 30,21 hole: 28.411,23.9 28.367,24.239 28.236,24.556 28.027,24.827 27.756,25.036 27.439,25.167 27.1,25.211 26.761,25.167 26.444,25.036 26.173,24.827 25.964,24.556 25.833,24.239 25.789,23.9 25.833,23.561 25.964,23.244 26.173,22.973 26.444,22.764 26.761,22.633 27.1,22.589 27.439,22.633 27.756,22.764 28.027,22.973 28.236,23.244 28.367,23.561
PCI-SIG Outline:
  the board outline again, w0.1
OGR:
  region: 25.9,21 24.2,22.7 24.2,26.8 30,26.8 30,21 hole: 28.411,23.9 28.367,24.239 28.236,24.556 28.027,24.827 27.756,25.036 27.439,25.167 27.1,25.211 26.761,25.167 26.444,25.036 26.173,24.827 25.964,24.556 25.833,24.239 25.789,23.9 25.833,23.561 25.964,23.244 26.173,22.973 26.444,22.764 26.761,22.633 27.1,22.589 27.439,22.633 27.756,22.764 28.027,22.973 28.236,23.244 28.367,23.561
  region: 5.8,22.7 4.1,21 0,21 0,26.8 5.8,26.8 hole: 2.9,25.211 2.561,25.167 2.244,25.036 1.973,24.827 1.764,24.556 1.633,24.239 1.589,23.9 1.633,23.561 1.764,23.244 1.973,22.973 2.244,22.764 2.561,22.633 2.9,22.589 3.239,22.633 3.556,22.764 3.827,22.973 4.036,23.244 4.167,23.561 4.211,23.9 4.167,24.239 4.036,24.556 3.827,24.827 3.556,25.036 3.239,25.167